# Altium PCB Golden_arduino Updated.PcbDoc
Units mil, origin at the board's own origin, x right, y up, seen from the top; angles counter-clockwise.
Board outline 3500 x 2685 mil, 2 copper layers (Top Layer, Bottom Layer), stack 61.756 mil thick; 58 components, 43 nets, 253 pads, 74 vias.
Unrouted connection lines stored in the file: 22.
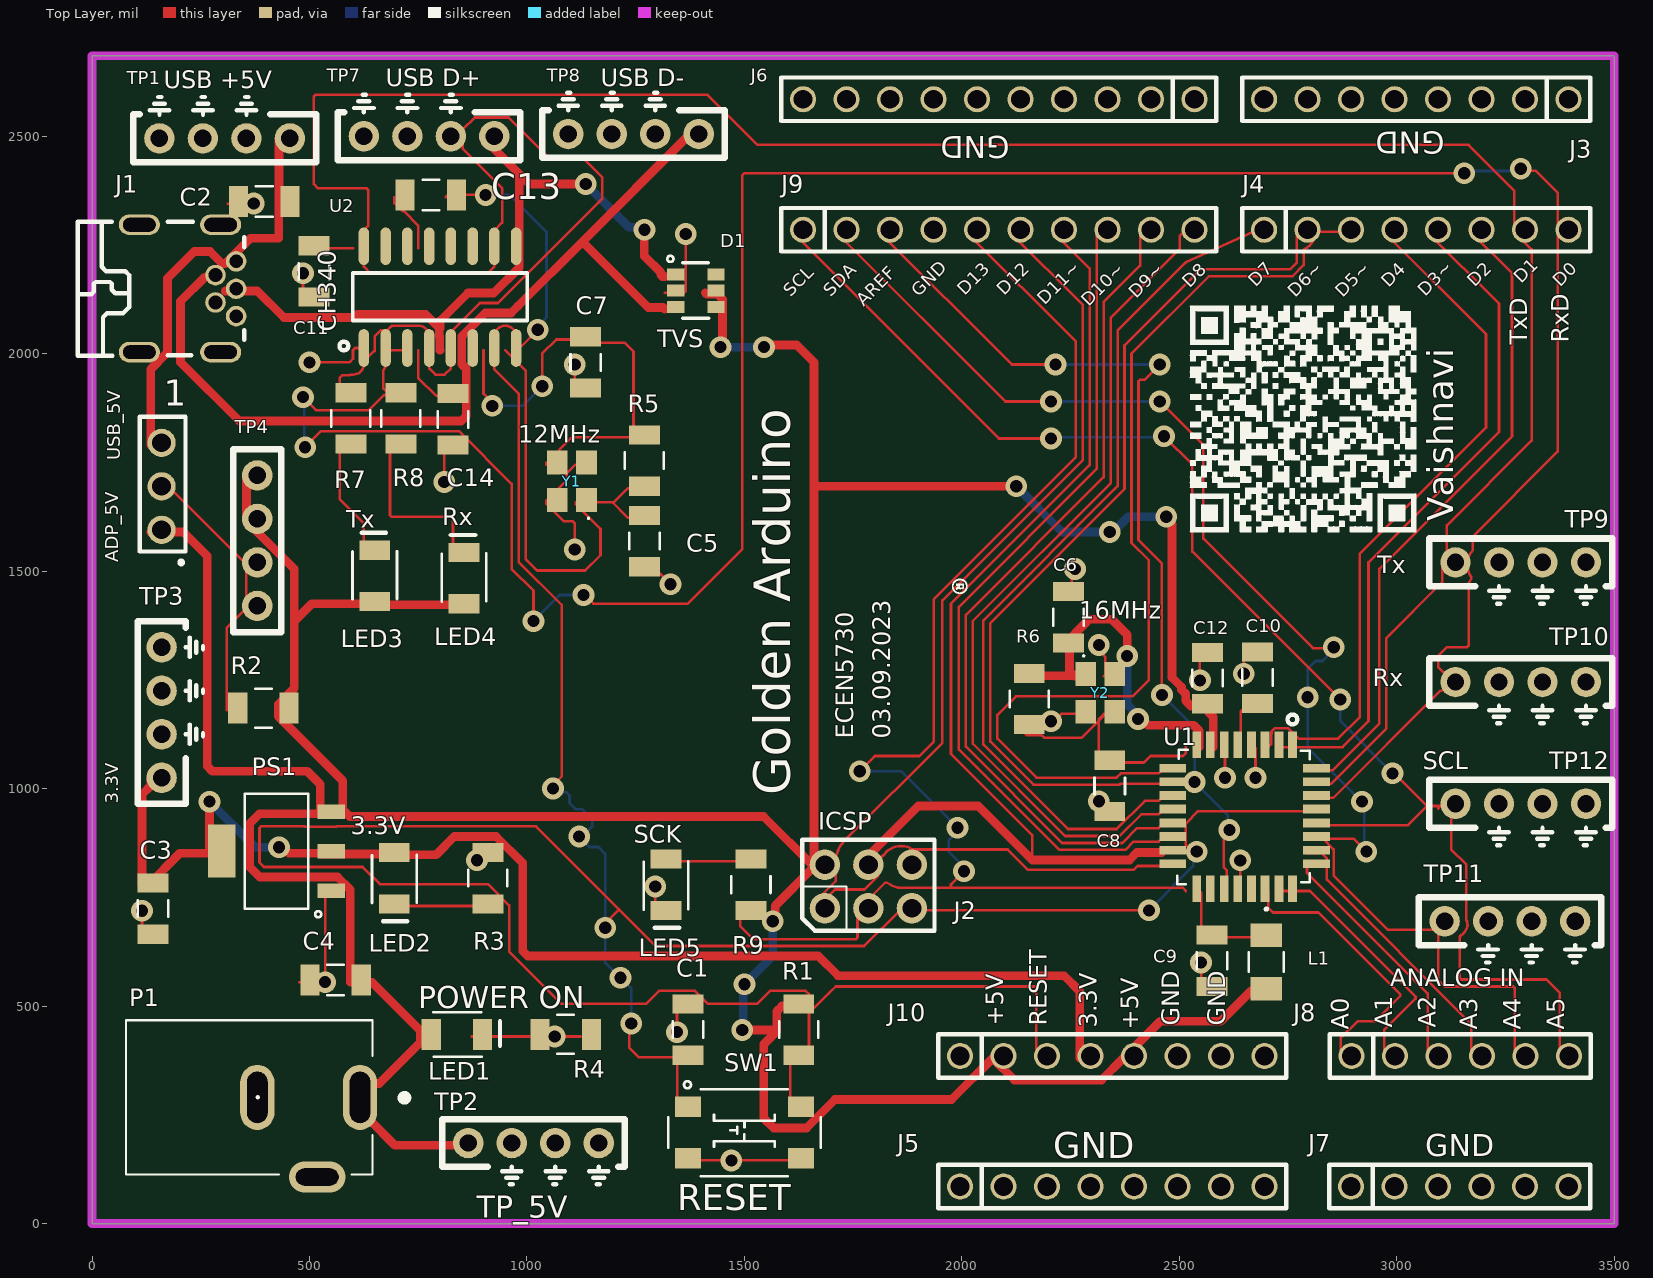
[diagram p0: Top Layer view]
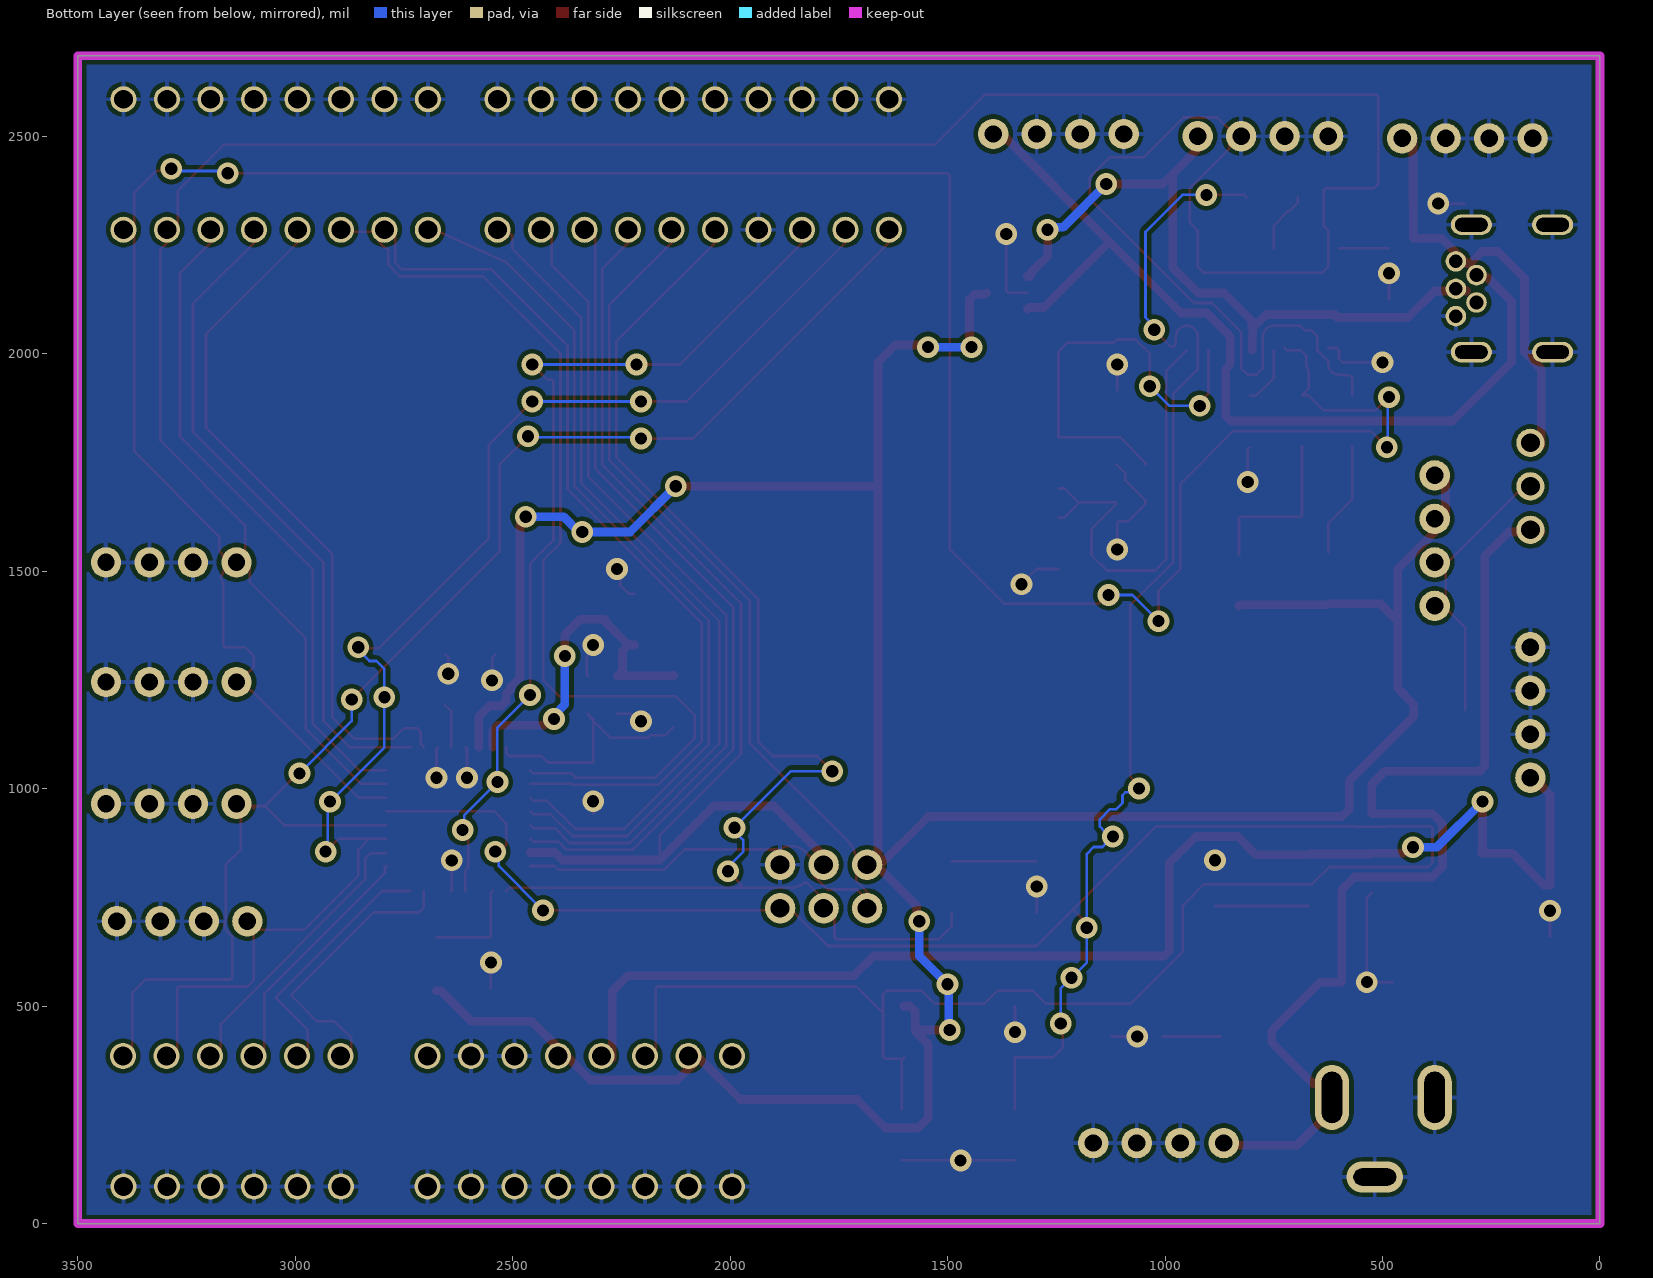
[diagram p1: Bottom Layer view, seen from below]
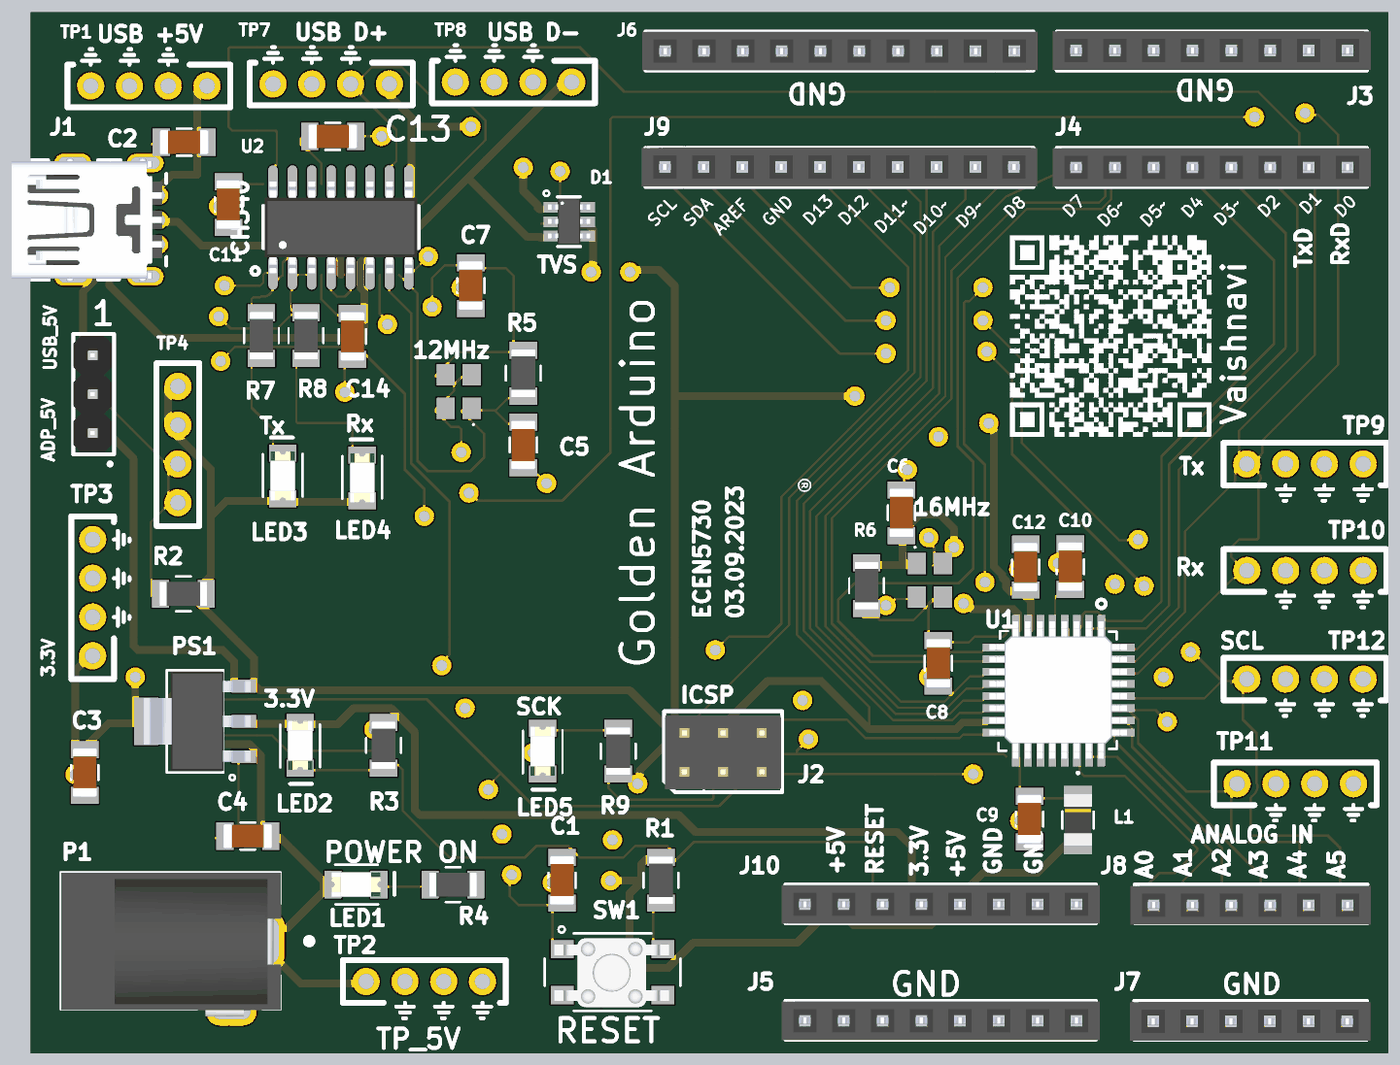
[diagram p2: 3D render of the assembled board from above, using the file's embedded part models]

## Layer stack, top to bottom
Top Solder: solder mask 1, SM-001, Dk 4
Top Layer: signal copper 1.378
Dielectric 1: core 59, Core-043, Dk 4.3
Bottom Layer: signal copper 1.378
Bottom Solder: solder mask 1, SM-001, Dk 4

## Board outline
0,0 3500,0 3500,2685 0,2685

## Design rules (kind name [scope] priority, off if disabled: settings)
Clearance [All] p1: gap=10 ignorepadtopadclearanceinfootprint=FALSE except(0: Arc-Hole Track-Hole SMDPad-Hole THPad-Hole Via-Hole Fill-Hole Poly-Hole Region-Hole Text-Hole)
PlaneClearance [All] p1: clearance=10
PlaneConnect [All] p1: planeconnectstyle=Direct reliefexpansion=20 reliefentries=4 reliefconductorwidth=10 reliefairgap=10
PolygonConnect [All] p1: thpad.connectstyle=Relief thpad.reliefconductorwidth=10 thpad.reliefentries=4 thpad.polygonreliefangle="90 Angle" thpad.airgapwidth=10 smdpad.connectstyle=Direct smdpad.reliefconductorwidth=10 smdpad.reliefentries=4 smdpad.polygonreliefangle="90 Angle" smdpad.airgapwidth=10 via.connectstyle=Direct via.reliefconductorwidth=10 via.reliefentries=4 via.polygonreliefangle="90 Angle" via.airgapwidth=10
RoutingVias [All] p1: holewidth=13 width=25 viastyle="Through Hole" minholewidth=13 minwidth=25 maxholewidth=60 maxwidth=80
SolderMaskExpansion [All] p1: expansion=4 istentingtop=FALSE
Width [All] p1: maxlimit=100 minlimit=6 preferedwidth=6 minimp=50.000000 maximp=50.000000 favimp=50.000000
28 further rules are at their usual default settings.

## Components (designator, comment, footprint, x,y, rotation, side; value= is the part's Value field where it differs from the comment)
1 "PREC003SAAN-RC" 3_PIN_100mil 160,1595 r90 top value="CONN HEADER VERT 3POS 2.54MM"
C1 "1uF" 1206_Passive_Capacitor 1370,446 r90 top
C2 "22uF" 1206_Passive_Capacitor 396,2350 r0 top
C3 "22uF" 1206_Passive_Capacitor 140,724 r90 top
C4 "22uF" 1206_Passive_Capacitor 560,560 r0 top
C5 "22pF" 1206_Passive_Capacitor 1270,1569 r90 top
C6 "22pF" 1206_Passive_Capacitor 2245,1394 r270 top
C7 "22uF" 1206_Passive_Capacitor 1135,1980 r90 top
C8 "22uF" 1206_Passive_Capacitor 2340,1006 r90 top
C9 "22uF" 1206_Passive_Capacitor 2575,604 r90 top
C10 "22uF" 1206_Passive_Capacitor 2680,1255 r270 top
C11 "22uF" 1206_Passive_Capacitor 510,2189 r90 top
C12 "22uF" 1206_Passive_Capacitor 2565,1254 r270 top
C13 "22uF" 1206_Passive_Capacitor 779,2365 r180 top
C14 "22uF" 1206_Passive_Capacitor 830,1849 r270 top
D1 "SRV05-4-P-T7" TVS 1387.76,2145 r0 top value="TVS DIODE 5.5V 6TSOP"
J1 "USB Mini" USB_MINI_B 220,2150 r270 top value="USB mini B"
J2 "NRPN032PAEN-RC" ICSP 1685,725 r90 top
J3 "PPTC081LFBN-RC" "8_PIN_100MIL - Female" 3395,2585 r180 top value=Female
J4 "PPTC081LFBN-RC" 8_PIN_ARD-DIG_100MIL 2695,2285 r0 top value=Female
J5 "PPTC081LFBN-RC" "8_PIN_100MIL - Female" 1996,85 r0 top value=Female
J6 "PPTC101LFBN-RC" "10_PIN_100MIL - Female" 2535,2585 r180 top value=Female
J7 "PPTC061LFBN-RC" "6_PIN_100MIL -Female" 2895,85 r0 top value=Female
J8 "PPTC061LFBN-RC" "6_PIN_100MIL -Female" 2896,385 r0 top value=Female
J9 "PPTC101LFBN-RC" 10_PIN_ARDUINO_100MIL 1635,2285 r0 top value=Female
J10 "PPTC081LFBN-RC" "8_PIN_100MIL - Female" 1996,385 r0 top value=Female
L1 "FB_10uH_1206" AIML-1206_ABR-M 2700,601.5 r270 top
LED1 "Red" LED_1206 839,435 r0 top
LED2 "Red" LED_1206 695,794 r270 top
LED3 "Yellow" LED_1206 650,1489 r90 top
LED4 "Green" LED_1206 855,1484 r90 top
LED5 "Red" LED_1206 1320,779 r270 top
P1 "Power Jack" Power_Jack 616.22,290 r180 top value="CONN PWR JACK 2X5.5MM SOLDER"
PS1 "AMS1117-3.3" LDO 424,856 r90 top value="IC REG LINEAR 3.3V 800MA SOT223"
R1 "10k" 1206_Passive_Resitor 1625,446 r90 top value=10KOhm
R2 "500m" 1206_Passive_Resitor 394,1185 r0 top value=500mOhm
R3 "1k" 1206_Passive_Resitor 910,794 r270 top value="1K Ohm"
R4 "1k" 1206_Passive_Resitor 1089,435 r180 top value="1K Ohm"
R5 "1M" 1206_Passive_Resitor 1270,1754 r90 top value="1M Ohm"
R6 "1M" 1206_Passive_Resitor 2155,1206 r270 top value="1M Ohm"
R7 "1k" 1206_Passive_Resitor 595,1851 r270 top value="1K Ohm"
R8 "1k" 1206_Passive_Resitor 710,1851 r270 top value="1K Ohm"
R9 "1k" 1206_Passive_Resitor 1515,779 r90 top value="1K Ohm"
SW1 "TL3305AF160QG" Switch_JLC 1500.08,209.06 r0 top
TP1 "10x Probe TP" TP10x_Probe 305,2495 r180 top
TP2 "10x Probe TP" TP10x_Probe 1015,185 r0 top
TP3 "10x Probe TP" TP10x_Probe 160,1175 r90 top
TP4 "10x Probe Floating TP" TP10x_Floating 380,1570 r90 top
TP7 "10x Probe TP" TP10x_Probe 775,2500 r180 top
TP8 "10x Probe TP" TP10x_Probe 1245,2505 r180 top
TP9 "10x Probe TP" TP10x_Probe 3285,1520 r0 top
TP10 "10x Probe TP" TP10x_Probe 3285,1245 r0 top
TP11 "10x Probe TP" TP10x_Probe 3260,695 r0 top
TP12 "10x Probe TP" TP10x_Probe 3285,965 r0 top
U1 "ATMEGA328P-ANR" ATMega328P 2650,935 r90 top value="IC MCU 8BIT 32KB FLASH 32TQFP"
U2 "CH340G" "USB to serial" 800,2130 r0 top value="USB to Serial"
Y1 "X322512MSB4SI" "Crystal resonator" 1101.5,1706.68 r90 top value=12MHz
Y2 "X322516MLB4SI" "Crystal resonator" 2320,1220 r270 top value=16MHz

## Footprints (in the part's own frame and the unit in brackets; to place one, negate y for a bottom-side part, rotate by r counter-clockwise, add the part's x,y. Pads: shape width x height; smd on the part's side, far side on the other; paste and mask are expansions set on the pad)
3_PIN_100mil [mm]
  round 1.65 hole 1.1: 1(0,0) 2(2.54,0) 3(5.08,0)
  silkscreen extent -2,-1.4 6.6,1.27, body extent -1.14,-1.27 6.48,1.27, height 8.38
"6_PIN_100MIL -Female" [mil]
  round 60 hole 43.31: 1(0,0) 2(100,0) 3(200,0) 4(300,0) 5(400,0) 6(500,0)
  silkscreen extent -50,-50 550,50, body extent -61,-53 559,47, height 335
"8_PIN_100MIL - Female" [mil]
  round 60 hole 43.31: 1(0,0) 2(100,0) 3(200,0) 4(300,0) 5(400,0) 6(500,0) 7(600,0) 8(700,0)
  silkscreen extent -50,-50 750,50, body extent -60,-51 760,49, height 335
8_PIN_ARD-DIG_100MIL [mil]
  round 60 hole 43.31: 1(0,0) 2(100,0) 3(200,0) 4(300,0) 5(400,0) 6(500,0) 7(600,0) 8(700,0)
  silkscreen extent -50,-50 750,50, body extent -60,-50 760,50, height 335
"10_PIN_100MIL - Female" [mil]
  round 60 hole 43.31: 1(0,0) 2(100,0) 3(200,0) 4(300,0) 5(400,0) 6(500,0) 7(600,0) 8(700,0) 9(800,0) 10(900,0)
  silkscreen extent -50,-50 950,50, body extent -61,-50 959,50, height 335
10_PIN_ARDUINO_100MIL [mil]
  round 60 hole 43.31: 1(0,0) 2(100,0) 3(200,0) 4(300,0) 5(400,0) 6(500,0) 7(600,0) 8(700,0) 9(800,0) 10(900,0)
  silkscreen extent -50,-50 950,50, body extent -60,-49 960,51, height 335
1206_Passive_Capacitor [mil]
  rect 44x71 smd: 1(-59,0) 2(59,0)
  silkscreen extent -19,-35 19,35, body extent -63,-31 63,32, height 50
1206_Passive_Resitor [mil]
  rect 44x71 smd: 1(-59,0) 2(59,0)
  silkscreen extent -19,-45 19,45, body extent -61,-31 61,31, height 26
AIML-1206_ABR-M [mil]
  rect 54x73 smd paste+0 mask+0: 1(-61.5,0) 2(61.5,0)
  silkscreen extent -124,-41 22,41, body extent -66,-36 66,36, height 55
ATMega328P [mm]
  rect 1.55x0.508 smd mask+0.025: 1(4.2,-2.794) 2(4.2,-2.007) 3(4.2,-1.194) 4(4.2,-0.406) 5(4.2,0.406) 6(4.2,1.194) 7(4.2,2.007) 8(4.2,2.794) 17(-4.2,2.794) 18(-4.2,2.007) 19(-4.2,1.194) 20(-4.2,0.406) 21(-4.2,-0.406) 22(-4.2,-1.194) 23(-4.2,-2.007) 24(-4.2,-2.794)
  rect 0.508x1.55 smd mask+0.025: 9(2.843,4.2) 10(2.056,4.2) 11(1.243,4.2) 12(0.455,4.2) 13(-0.357,4.2) 14(-1.145,4.2) 15(-1.958,4.2) 16(-2.745,4.2) 25(-2.745,-4.2) 26(-1.958,-4.2) 27(-1.145,-4.2) 28(-0.357,-4.2) 29(0.455,-4.2) 30(1.243,-4.2) 31(2.056,-4.2) 32(2.843,-4.2)
  silkscreen extent -3.94,-3.81 5.97,3.94, body extent -4.45,-4.47 4.55,4.53, height 1.16
"Crystal resonator" [mil]
  rect 55.11x47.24 smd: 1(-43.3,-35.43) 2(43.31,-35.43) 3(43.32,31.5) 4(-43.3,31.5)
  silkscreen extent -87,-42 -83,-38, body extent -65,-47 65,47, height 31
ICSP [mil]
  round 70 hole 43.31: 1(0,0) 2(0,-100) 3(0,-200) 4(100,0) 5(100,-100) 6(100,-200)
  silkscreen extent -52,-252 157,52, body extent -44,-250 146,50, height 330
LDO [mil]
  rect 33x63 smd: 1(-91,-126) 2(0,-126) 3(91,-126)
  rect 122x63 smd: 4(0,126)
  silkscreen extent -152,-103 132,73, body extent -128,-144 128,132, height 73
LED_1206 [mil]
  rect 44x71 smd: 1(-59,0) 2(59,0)
  silkscreen extent -54,-51 99,51, body extent -63,-31 63,31, height 28
Power_Jack [mm]
  oval 2x3.8 hole 1.2 slot 3 at 90 deg: 1(0,0) 2(6,0)
  oval 3.3x1.8 hole 1 slot 2.5 at 0 deg: 3(2.5,4.65)
  silkscreen extent -2.79,-4.5 13.68,4.5, body extent -0.76,-4.45 13.64,4.95, height 11.49
Switch_JLC [mm]
  rect 1.5x1.2 smd: 1(-3.3,1.5) 2(3.3,1.5) 3(-3.3,-1.5) 4(3.3,-1.5)
  silkscreen extent -4.44,-2.54 4.45,3, body extent -3.8,-2.29 3.7,2.21, height 3.7
TP10x_Floating [mil] "Small Probs footprint"
  round 70 hole 40: 1(-150,0) 2(-50,0) 3(50,0) 4(150,0)
  silkscreen extent -210,-55 210,55
TP10x_Probe [mil] "Small Probs footprint"
  round 70 hole 40: 1(-150,0) 2(-50,0) 2(50,0) 2(150,0)
  silkscreen extent -210,-95 210,55
TVS [mm]
  rect 1x0.7 smd mask+0.025: 1(-1.162,0.95) 2(-1.162,0) 3(-1.162,-0.95) 4(1.2,-0.95) 5(1.2,0) 6(1.2,0.95)
  silkscreen extent -1.65,-1.63 0.76,2.03, body extent -1.37,-1.44 1.38,1.46, height 1.1
"USB to serial" [mil]
  oval 24x86.61 smd: 1(-175,-117) 2(-125,-117) 3(-75,-117) 4(-25,-117) 5(25,-117) 6(75,-117) 7(125,-117) 8(175,-117) 9(175,117) 10(125,117) 11(75,117) 12(25,117) 13(-25,117) 14(-75,117) 15(-125,117) 16(-175,117)
  silkscreen extent -231,-122 201,56, body extent -197,-118 197,118, height 71
USB_MINI_B [mm]
  round 1.2 hole 0.8: 1(-1.58,2.826) 2(-0.78,1.622) 3(0.02,2.826) 4(0.82,1.622) 5(1.62,2.826)
  oval 1.2x2.4 hole 0.8 slot 1.9 at 90 deg: 6(-3.72,1.924) 7(3.72,1.924) 8(-3.72,-2.826) 9(3.72,-2.826)
  silkscreen extent -3.89,-6.42 3.93,3.3, body extent -4.04,-6.83 4.06,3.02, height 3.98

## Part data
1: library part SW_3Pin_100mil_Switch, "Connector Header Through Hole 3 position 0.100\" (2.54mm)", LCSC Part#=C49257, Digikey Link=https://www.digikey.com/product-detail/en/PREC003SAAN-RC/S1012EC-03-ND/2774851/?itemSeq=304982371, MFR Part #=PREC003SAAN-RC, Type=Extended
C1: library part C_1uF_1206, "MULTILAYER CERAMIC CAPACITORS MLCC - SMD/SMT 1UF 50V 1206 ROHS", LCSC Part#=C1848, MFR Part #=CL31B105KBHNNNE, Digikey Link=https://www.digikey.com/product-detail/en/C1206C105M4RACTU/399-8150-1-ND/3471873/?itemSeq=304982366, Type=Basic
C2 C3 C4 C7 C8 C9 C10 C11 C12 C13 C14: library part C_22uF_1206, "22uF ±10% 25V X5R 1206 Multilayer Ceramic Capacitors MLCC - SMD/SMT RoHS", LCSC Part#=C12891, MFR Part #=CL31A226KAHNNNE, Datasheet=https://datasheet.lcsc.com/lcsc/1811031514_Samsung-Electro-Mechanics-CL31A226KAHNNNE_C12891.pdf, Type=basic
C5 C6: library part C_22pF_1206, "22pF ±5% 1kV C0G 1206 Multilayer Ceramic Capacitors MLCC - SMD/SMT RoHS", LCSC Part#=C313096, MFR Part #=1206CG220J102NT, Datasheet=https://datasheet.lcsc.com/lcsc/1810311150_FH-Guangdong-Fenghua-Advanced-Tech-1206CG220J102NT_C313096.pdf, Type=Extended
D1: library part D_TVS_Diode, "TVS SOT-23-6 ROHS", LCSC Part#=C85364, Datasheet=https://datasheet.lcsc.com/szlcsc/ProTek-Devices-SRV05-4-P-T7_C85364.pdf, MFR Part #=SRV05-4-P-T7, Type=Basic
J1: library part J_USB_B_Mini, "Through Hole USB Connectors RoHS", LCSC Part#=C46398, MFR Part #=920-462A2021D10102, Datasheet=https://datasheet.lcsc.com/szlcsc/2103081233_Jing-Extension-of-the-Electronic-Co-920-462A2021D10102_C46398.pdf, Type=Extended
J2: library part J_ICSP, "Connector Header Through Hole 6 position 0.079\" (2.00mm)", LCSC Part#=C124384, Digikey Link=https://www.digikey.com/product-detail/en/NRPN032PAEN-RC/S5801-03-ND/804955/?itemSeq=304982355, MFR Part #=NRPN032PAEN-RC, Type=Extended
J3 J5 J10: library part JF_8_PIN_FEMALE, "8 Position Header Connector 0.100\" (2.54mm) Through Hole Tin", LCSC Part#=C27438, Digikey Link=https://www.digikey.com/product-detail/en/PPTC081LFBN-RC/S7006-ND/810147/?itemSeq=304982354, MFR Part #=PPTC081LFBN-RC, Type=Extended
J4: library part JF_8_PIN_FEMALE_ARD-Dig, "8 Position Header Connector 0.100\" (2.54mm) Through Hole Tin", LCSC Part#=C27438, Digikey Link=https://www.digikey.com/product-detail/en/PPTC081LFBN-RC/S7006-ND/810147/?itemSeq=304982354, MFR Part #=PPTC081LFBN-RC, Type=Extended
J6: library part JF_10_PIN_FEMALE_, "10 Position Header Connector 0.100\" (2.54mm) Through Hole Tin", LCSC Part#=C225507, Digikey Link=https://www.digikey.com/product-detail/en/PPTC101LFBN-RC/S7008-ND/810149/?itemSeq=304982352, MFR Part #=PPTC101LFBN-RC, Type=Extended
J7 J8: library part JF_6_PIN_FEMALE, "6 Position Header Connector 0.100\" (2.54mm) Through Hole Tin", LCSC Part#=C40877, Digikey Link=https://www.digikey.com/product-detail/en/PPTC061LFBN-RC/S7004-ND/810145/?itemSeq=304982353, MFR Part #=PPTC061LFBN-RC, Type=Extended
J9: library part JF_10_PIN_FEMALE_ARDUINO, "10 Position Header Connector 0.100\" (2.54mm) Through Hole Tin", LCSC Part#=C225507, Digikey Link=https://www.digikey.com/product-detail/en/PPTC101LFBN-RC/S7008-ND/810149/?itemSeq=304982352, MFR Part #=PPTC101LFBN-RC, Type=Extended
L1: "25mA 10uH ±10% 800mΩ 1206  Inductors (SMD) ROHS", LCSC Part#=C1051, MFR Part #=CMI321609X100KT, Mfr_Name="FH (Guangdong Fenghua Advanced Tech)", Datasheet=https://datasheet.lcsc.com/lcsc/1810311314_FH--Guangdong-Fenghua-Advanced-Tech-CMI321609X100KT_C1051.pdf, Type=Basic
LED1 LED2 LED5: library part LED_RED_1206, "Red 621~631nm 1206 Light Emitting Diodes (LED) RoHS", LCSC Part#=C93133, MFR Part #=15-21/R6C-FQ1R1B/2T, Datasheet=https://datasheet.lcsc.com/szlcsc/1811151241_Everlight-Elec-15-21-R6C-FQ1R1B-2T_C93133.pdf, Type=Extended
LED3: library part LED_YELLOW_1206, "yellow 1206  Light Emitting Diodes (LED) ROHS", LCSC Part#=C93094, MFR Part #=NCD1206Y1, Datasheet=https://datasheet.lcsc.com/lcsc/2008201033_Foshan-NationStar-Optoelectronics-NCD1206Y1_C93094.pdf, Type=Extended
LED4: library part LED_GREEN_1206, "Green 513~528nm 1206 Light Emitting Diodes (LED) RoHS", LCSC Part#=C434439, MFR Part #=SZYY1206G, Datasheet=https://datasheet.lcsc.com/lcsc/2006301532_Yongyu-Photoelectric-SZYY1206G_C434439.pdf, Type=Extended
P1: library part "P_Power Jack", "Power Barrel Connector Jack 2.10mm ID (0.083\"), 5.50mm OD (0.217\") Through Hole, Right Angle", LCSC Part#=C136744, MFR Part #=PJ-102A, Digikey Link=https://www.digikey.com/product-detail/en/PJ-102A/CP-102A-ND/275425/?itemSeq=304982367, Type=Extended
PS1: library part PS_AMS_LDO_3v3, "LOW DROPOUT REGULATORS(LDO) POSITIVE FIXED 1.3V @ 800MA 15V 3.3V 1A SOT-223 ROHS", LCSC Part#=C6186, MFR Part #=AMS1117-3.3, Type=Basic
R1: library part R_10KOhm_1206, "10 kOhms ±5% 0.25W, 1/4W Chip Resistor 1206 (3216 Metric) Automotive AEC-Q200 Thick Film", LCSC Part#=C17902, MFR Part #=RMCF1206FT10K0, Digikey Link=https://www.digikey.com/en/products/detail/stackpole-electronics-inc/RMCF1206FT10K0/1759669, Type=Basic
R2: library part R_500mOhm_1206, "Resistors/Shunt 250mW 500mΩ ±800ppm/℃ ±5% 1206  Current Sense  Resistors ROHS", LCSC Part#=C247433, MFR Part #=1206W4J050KT5E, Datasheet=https://datasheet.lcsc.com/lcsc/1810301438_UNI-ROYAL-Uniroyal-Elec-1206W4J050KT5E_C247433.pdf, Type=Extended
R3 R4 R7 R8 R9: library part R_1K_1206, "CHIP RESISTOR - SURFACE MOUNT 1KOHMS ±1% 1/4W 1206 ROHS", LCSC Part#=C4410, MFR Part #=RNCP1206FTD1K00CT, Digikey Link=https://www.digikey.com/product-detail/en/RNCP1206FTD1K00/RNCP1206FTD1K00CT-ND/2240675/?itemSeq=304982373, Type=Basic
R5 R6: library part R_1M_1206, "CHIP RESISTOR - SURFACE MOUNT 1MOHMS ±1% 1/4W 1206 ROHS", LCSC Part#=C17927, MFR Part #=RMCF1206JT1M00, Digikey Link=https://www.digikey.com/product-detail/en/RMCF1206JT1M00/RMCF1206JT1M00CT-ND/1942830/?itemSeq=304982358, Type=Basic
SW1: library part SW_Push_Button_JLC, "Tactile Switch SPST-NO Top Actuated Surface Mount", LCSC Part#=C2837550, MFR Part #=KH-4.5X4.5X4.3H-STM, Datasheet=https://datasheet.lcsc.com/lcsc/2106081532_Shenzhen-Kinghelm-Elec-KH-4.5X4.5X4.3H-STM_C2837550.pdf, Type=Extended
TP1 TP2 TP3 TP7 TP8 TP9 TP10 TP11 TP12: library part TP_10x_Probe, "Test Point 300 mil centers"
TP4: library part TP_10x_Floating, "Test Point 300 mil centers"
U1: library part U_ATMega328P, "AVR AVR® ATmega Microcontroller IC 8-Bit 20MHz 32KB (16K x 16) FLASH 32-TQFP (7x7)", LCSC Part#=C14877, MFR Part #=ATMEGA328P-AU, Digikey Link=https://www.digikey.com/product-detail/en/ATMEGA328P-ANR/ATMEGA328P-ANRCT-ND/2774230/?itemSeq=304982365, Type=Basic
U2: library part U_USBtoSerial, "Transceiver USB 2.0 2Mbps SOP-16_150mil USB ICs RoHS", LCSC Part#=C14267, Datasheet=https://datasheet.lcsc.com/lcsc/2008191806_WCH-Jiangsu-Qin-Heng-CH340G_C14267.pdf, MFR Part #=CH340G, Type=Basic
Y1: library part X_12MHz_Res, "SMD Crystal Resonators 12MHz ±10ppm SMD-3225_4P RoHS", LCSC Part#=C9002, Datasheet=https://datasheet.lcsc.com/szlcsc/Yangxing-Tech-X322512MSB4SI_C9002.pdf, MFR Part #=X322512MSB4SI, Type=Basic
Y2: library part X_16Mhz_Res, "±10ppm 16000000Hz -40℃~85℃ 贴片无源晶振 60Ω 9pF SMD3225-4P Crystals ROHS", LCSC Part#=C13738, MFR Part #=X322516MLB4SI, Type=Basic

## Via types
v1: diameter 50, hole 28, Top Layer to Bottom Layer, 74 vias

## Nets (pads, with @x,y where several pads share a name; then routed paths per layer and width w, separated by ;. In a path a pad name is that pad's centre, name@x,y a point inside that pad or via, vN(x,y) a via of type N, cw(c..) or ccw(c..) an arc to the next point about the centre after c; other vN are vias at no path point)
3.3V: C3.2 J10.4 LED2.1 PS1.2 PS1.4 TP3.1 | length 3047.5
  Top Layer w20: TP3.1@135,1020 135,1006.47 115,986.47 115,778 128.5,778 201.5,851 273,851 270,854 v1(270,970) ; v1(430,865) 438.12,865 452.12,851 525,851 526.5,849.5 668.5,849.5 670,848 791.14,848 833.14,890 928.78,890 990,828.78 990,626.72 1001.72,615 1670,615 1715,570 2235,570 2271,534 J10.4@2271,380
  Bottom Layer w20: v1(270,970) 375,865 v1(430,865)
12MHz_Osc-1: C5.2 R5.1 U2.8 Y1.1 | length 1052.1
  Top Layer w6: 950,2008 997,1961 997,1528.12 1023.62,1501.5 1134,1501.5 1169,1536.5 1169,1597.37 1111.93,1654.44 1111.93,1658.38 1196.12,1658.38 ; C5.2@1245,1623 1231.5,1623 1196.12,1658.38 ; R5.1@1245,1690 1231.5,1690 1199.88,1658.38 1196.12,1658.38
12MHz_Osc-2: C7.2 R5.2 U2.7 Y1.3 | length 1005.2
  Top Layer w6: 900,2008 900,1908.08 920,1888.08 v1(920,1880) ; v1(1035,1925) 1035,2000 1067.51,2032.51 1111.49,2032.51 1119,2025 1225,2025 1245,2005 1245,1808 1104.07,1808 1045,1748.93 1045,1745
  Bottom Layer w6: v1(920,1880) 990,1880 v1(1035,1925)
"16MHz Osc-1": C6.2 R6.1 U1.7 Y2.1 | length 807.6
  Top Layer w20: R6.1@2130,1260 2130.85,1259.15 2258.72,1259.15 ; C6.2@2220,1330 C6.2@2233.5,1330 ; 2259.57,1258.3 2258.72,1259.15 ; v1(2380,1305) 2380,1353.64 2344.57,1389.07 2287.43,1389.07 2287.43,1383.93 C6.2@2233.5,1330 ; v1(2405,1160) 2413.12,1160 2427.25,1145.87 2533.28,1145.87 2546,1133.15 2546,1095.35 ; C6.2@2233.5,1330 2247.64,1315.86 2247.64,1270.23 2258.72,1259.15
  Bottom Layer w20: v1(2380,1305) 2380,1193.12 2405,1168.12 v1(2405,1160)
"16MHz Osc-2": C8.2 R6.2 U1.8 Y2.3 | length 570.8
  Top Layer w6: R6.2@2130,1142 2149,1123 2183.26,1123 2189.26,1117 2275.75,1117 2326.5,1167.75 2326.5,1171.68 2315,1160.18 2315,1060 2418.82,1060 2433.66,1074.84 2508,1074.84 2515,1081.84 2515,1095.35
328_MISO: J2.1 J9.6 U1.16 | length 2787.5
  Top Layer w6: J9.6@2110,2280 2278,2112 2278,1755.37 1955,1432.37 1955,1105 1730.68,880.68 ccw(c1782.8,828.53) 1710.08,840.68 ccw(c1716,839.72) 1710,839.76 1710,786.97 1660,736.97 1660,720 1708,768 1775.88,768 1808,800.12 1808,835.88 1815.39,843.27 1817.12,845 ccw(c1815.66,850.82) 1820.57,847.37 cw(c1860,820) 1860,868 cw(c1860,820) 1886.53,860 2105.27,860 2152.27,813 2394.82,813 2403.75,821.93 U1.16@2459.65,821.93
328_MOSI: J2.5 J9.7 U1.15 | length 2512.3
  Top Layer w6: J2.5@1760,820 1760,820.41 J2.5@1765.49,825.89 ; 2161.8,836 2161.8,893.2 1975,1080 1975,1425 2294,1744 2294,2196 J9.7@2210,2280
  Top Layer w20: J2.5@1760,820.41 1899.59,960 2037.8,960 2161.8,836 2385.29,836 2402.22,852.93 U1.15@2459.65,852.93
328_SCK: J2.2 J9.5 R9.1 U1.17 | length 3227.2
  Top Layer w6: R9.1@1490,715 1490,684 1520,654 1756.49,654 1760,657.51 1760,720 1823.81,783.81 1828.47,783.81 ccw(c1860,820) 1860,772 1975,772 ; v1(1765,1040) 1800,1075 1902.37,1075 1935,1107.63 1935,1435 2262,1762 2262,2028 J9.5@2010,2280 ; v1(2005,810) 1975,780 1975,772 ; 2515,764.65 2515,765 2508,772 1975,772
  Bottom Layer w6: v1(1765,1040) 1860,1040 v1(1990,910) 1990,901.92 1970,881.92 1970,854.41 2005,819.41 v1(2005,810)
+5V: C12.2 D1.5 J2.4 J10.2 J10.5 L1.2 LED3.1 LED4.1 R1.2 R2.2 TP4.3 TP4.4 U1.6 | length 7525.9
  Top Layer w20: TP4.4@355,1715 355,1615 465,1505 465,1385 ; LED4.1@830,1420 827.5,1422.5 627.5,1422.5 625,1425 505,1425 465,1385 ; 1410,2140 1413.62,2136.38 1437.97,2136.38 1449.69,2124.66 1449.69,2019.69 v1(1445,2015) ; v1(1495,445) 1571.78,445 1574.5,442.28 ; v1(1545,2015) 1550,2020 1620,2020 1660,1980 1660,1695 ; v1(1565,695) 1570.74,700.74 1570.74,730.74 J2.4@1660,820 ; R1.2@1600,500 1586.5,500 1574.5,488 1574.5,442.28 ; v1(2125,1695) 1660,1695 ; v1@2477.53,1612.47 2483,1607 2483,1255.64 2505,1233.64 2505,1227.58 2514.5,1218.08 2514.5,1202 2526.5,1190 2540,1190 2553.5,1190 2578,1165.5 2578,1095.35 ; L1.2@2675,535 2665.5,535 2595.5,465 2456,465 2371,380 2321,330 2121,330 2071,380 1976,285 1708.32,285 1642.81,219.49 1567.19,219.49 1544.5,242.18 1544.5,412.28 1574.5,442.28 ; 465,1385 465,1230.5 428,1193.5 428,1180 428,1166.5 576.5,1018 576.5,951.72 592.22,936 1544,936 J2.4@1660,820 ; J2.4@1660,820 1660,1695
  Bottom Layer w20: v1(1445,2015) v1(1545,2015) ; v1(1495,445) 1497.5,447.5 1497.5,547.5 v1(1500,550) 1565,615 v1(1565,695) ; v1(2125,1695) 2230,1590 v1(2340,1590) 2347.78,1590 2382.78,1625 v1(2470,1625)
AD0: J8.1 U1.23 | length 651.4
  Top Layer w6: 2704,764.65 2704,726.73 2715.73,715 2820,715 3007.51,527.49 3007.51,522.51 2950,465 2910,465 2871,426 J8.1@2871,380
AD1: J8.2 U1.24 | length 580.4
  Top Layer w6: 2735,764.65 2800.35,764.65 3043.13,521.87 3043.13,516.9 2971,444.77 J8.2@2971,380
AD2: J8.3 U1.25 | length 558.2
  Top Layer w6: U1.25@2790.35,821.93 2793.56,818.73 2793.56,806.44 3071,529 J8.3@3071,380
AD3: J8.4 U1.26 | length 650.9
  Top Layer w6: U1.26@2790.35,852.93 2791.65,851.64 2826.35,851.64 2839,838.99 2839,791 3171,459 J8.4@3171,380
AD4/SDA: J8.5 J9.2 TP11.1 U1.27 | length 3227.6
  Top Layer w6: J9.2@1710,2280 2100,1890 v1(2205,1890) ; v1(2455,1890) 2555,1790 2555,1575 2806.96,1323.04 2853.04,1323.04 v1(2855,1325) ; U1.27@2790.35,884.93 U1.27@2830.07,884.93 ; v1(2930,855) 2900.07,884.93 U1.27@2830.07,884.93 ; J8.5@3271,380 3271,541.49 3267.49,545 3110,545 3095,560 3095,675 2980,675 2855,800 2855,860 U1.27@2830.07,884.93
  Bottom Layer w6: v1(2205,1890) v1(2455,1890) ; v1(2855,1325) 2855,1318.91 2829.38,1293.29 2813.29,1293.29 2795,1275 v1(2795,1210) 2795,1095 2925,965 2925,860 v1(2930,855)
  other v1: 2920,970
AD5/SCL: J8.6 J9.1 TP12.1 U1.28 | length 3337.4
  Top Layer w6: J9.1@1610,2280 2085,1805 v1(2205,1805) ; v1(2465,1810) 2530,1745 2530,1545 v1(2870,1205) ; U1.28@2790.35,915.93 3025.93,915.93 3070,960 ; v1(2990,1035) 2995,1035 3070,960 ; J8.6@3371,380 3375,384 3375,530 3344,561 3148.51,561 3145,564.51 3145,657.42 3145,658.78 3145.58,660 cw(c3151,657.42) 3147.64,662.39 ccw(c3127.83,692.08) 3162.68,684.39 ccw(c3156.82,685.65) 3162.73,686.66 cw(c3210,695) 3162.08,692.2 ccw(c3156.09,691.82) 3160.96,695.33 ccw(c3151.32,688.35) 3160,696.49 3160,825 3125,860 3125,960 TP12.1@3100.92,960 ; 3070,960 3095,960 ; 3095,960 3095,954.08 TP12.1@3100.92,960 ; 3095,960 TP12.1@3100.92,960
  Bottom Layer w6: v1(2205,1805) 2207.5,1807.5 2462.5,1807.5 v1(2465,1810) ; v1(2870,1205) 2870,1155 v1(2990,1035)
ADP_+5V: 1.1 C4.2 LED1.1 P1.1 PS1.3 TP2.1 | length 2480.7
  Top Layer w20: 1.1@135,1590 210,1590 265,1535 265,1051.72 276.72,1040 495,1040 525,1010 525,942 384.99,942 362,919.01 362,820.47 385.72,796.75 564.53,796.75 594,767.28 594,555 643.5,555 755,443.5 755,430 755,416.5 660.59,322.09 618.35,322.09 591.22,294.96 591.22,285 591.22,265.46 618.35,238.33 637.89,238.33 696.22,180 TP2.1@840,180
AREF: J9.3 U1.20 | length 2103
  Top Layer w6: J9.3@1810,2280 2115,1975 v1(2215,1975) ; v1(2455,1975) 2420,1940 2409.51,1940 2406,1936.49 2406,1571.63 2460,1517.63 v1(2460,1215) ; 2609,764.65 2609,812.26 2602,819.26 2602,880.09 2615,893.09 v1(2615,905)
  Bottom Layer w6: v1(2215,1975) v1(2455,1975) ; v1(2460,1215) 2535,1140 v1(2535,1015) 2611,939 2611,909 v1(2615,905)
CH340_RxD: J4.7 R8.1 TP10.1 U1.31 U2.3 | length 6450.8
  Top Layer w6: v1(485,1900) 515,1870 636.5,1870 671.5,1905 685,1905 670,1920 670,1961.69 ccw(c650,1976.69) 675,1976.69 675,1995 688,2008 720,2008 U2.3 ; v1(490,1785) 527,1822 843.88,1822 965,1700.88 965,1505 1015,1455 v1(1015,1385) ; v1(1130,1445) 1130,1440 1138.11,1440 1153.11,1425 1370,1425 1495,1550 1495,2410 1500,2415 v1(3155,2415) ; 2790.35,978.93 2853.93,978.93 3099.89,1224.89 3102.57,1224.89 3117.68,1240 3135,1240 3095,1280 3095,1305 3115,1325 3161.49,1325 3165,1328.51 3165,1471.88 ccw(c3100,1515) 3165.93,1473.32 ccw(c3100,1515) 3170.75,1482.16 ccw(c3165.31,1484.69) 3170.29,1488.03 cw(c3210,1515) 3175,1547.85 3175,1580 3370,1775 3370,2370 3319,2421 3289,2421 v1(3285,2425)
  Bottom Layer w6: v1(485,1900) 487.5,1897.5 487.5,1787.5 v1(490,1785) ; v1(1015,1385) 1075,1445 v1(1130,1445) ; v1(3155,2415) 3160,2420 3280,2420 v1(3285,2425)
CH340_TxD: J4.8 R7.1 TP9.1 U1.30 U2.2 | length 7121.3
  Top Layer w6: R7.1@570,1905 570,1945 575,1950 592,1950 593.9,1951.9 596.39,1951.9 596.76,1951.9 ccw(c600,1976.69) 625,1976.69 625,1983 647.52,2005.52 650,2005.52 650,2008 650,2039.07 664.97,2054.04 679.37,2054.04 687.89,2062.55 689.64,2064.31 750,2064.31 cw(c750,2039.31) 775,2039.31 775,1976.69 775,1966.34 776.76,1964.58 789.64,1951.69 810.36,1951.69 825,1966.34 825,2049.66 891.71,2116.37 933.46,2116.37 1173,2355.91 1173,2405.74 1126.74,2452 1048.93,2452 957.93,2543 880.12,2543 852,2514.88 852,2471.74 943,2380.74 943,2301.66 925,2283.66 925,2200.34 910.36,2185.69 639.64,2185.69 625,2200.34 625,2283.66 635,2293.66 635,2376.49 631.49,2380 520,2380 510,2390 510,2591.49 513.51,2595 1415,2595 1530,2480 3165,2480 3270,2375 3270,2280 3310,2240 3310,1800 3115,1605 3115,1545 TP9.1@3127.5,1532.5 ; 2790.35,1010.93 2849.07,1010.93 2975.91,1137.77 2975.91,1345.91 3104.51,1474.51 3104.51,1509.51 TP9.1@3110,1515
GND: C1.2 C2.1 C3.1 C4.1 C5.1 C6.1 C7.1 C8.1 C9.1 C10.1 C11.1 C12.1 C14.2 D1.2 J1.5 J1.6 J1.7 J1.8 J1.9 J2.6 J3.1 J3.2 J3.3 J3.4 J3.5 J3.6 J3.7 J3.8 J5.1 J5.2 J5.3 J5.4 J5.5 J5.6 J5.7 J5.8 J6.1 J6.2 J6.3 J6.4 J6.5 J6.6 J6.7 J6.8 J6.9 J6.10 J7.1 J7.2 J7.3 J7.4 J7.5 J7.6 J9.4 J10.6 J10.7 LED5.2 P1.2 P1.3 PS1.1 R3.1 R4.1 SW1.3 SW1.4 TP1.2 TP2.2 TP3.2 TP7.2 TP8.2 TP9.2 TP10.2 TP11.2 TP12.2 U1.3 U1.5 U1.21 U2.1 Y1.2 Y1.4 Y2.2 Y2.4 | length 2369.2
  Top Layer w6: C3.1@115,660 v1(115,719) ; 312,2345 v1(372,2345) ; 476,555 v1(536,555) 536,749 PS1.1@525,760 ; C11.1@485,2125 v1(485,2185) ; v1(500,1980) 591.69,1980 600,1988.31 600,2008 605,2013 U2.1 ; C14.2@805,1785 810,1780 v1(810,1705) ; v1(885,835.34) R3.1@885,848 ; v1(1064,430) 1123,430 ; v1(1110,1550) 1110,1610 1105,1615 1084.44,1615 1045,1654.44 1045,1662.31 1091.31,1708.62 1091.31,1724.37 1111.93,1744.99 ; C7.1@1110,1916 v1(1110,1975) ; C5.1@1245,1505 1295,1505 v1(1330,1470) ; LED5.2@1295,715 v1(1295,775) ; 1316.99,2140 1361.49,2140 1365,2143.51 v1(1365,2275) ; v1(1345,440) C1.2@1345,500 ; SW1.3@1345.16,145 v1(1470,145) SW1.4@1605,145 ; v1(2205,1155) 2212.15,1155 2228.84,1171.69 2259.57,1171.69 ; C6.1@2220,1448 2233.5,1448 2252.5,1467 2252.5,1497.5 v1(2260,1505) ; C8.1@2315,942 v1(2315,971) ; v1(2315,1330) 2315,1318.09 2330,1303.09 2330,1261.8 2326.5,1258.3 ; C12.1@2540,1308 2547.34,1300.66 v1(2547.34,1248.88) ; C9.1@2550,540 v1(2550,600) ; v1(2605,1025) 2605,1091.35 2609,1095.35 ; v1(2640,835) 2640,765.65 2641,764.65 ; v1(2648.08,1264) 2648.08,1302.08 C10.1@2655,1309 ; 2672,1095.35 2675,1092.35 v1(2675,1025)
Net1_2: 1.2 R2.1 TP4.1 TP4.2 | length 646.1
  Top Layer w6: 1.2@135,1690 180,1690 355,1515 355,1415 310,1370 310,1180
NetC9_2: C9.2 L1.1 U1.18 | length 233.3
  Top Layer w6: 2546,764.65 2550,760.65 2550,658 L1.1@2675,658
NetC10_2: C10.2 U1.4 | length 101.4
  Top Layer w6: 2641,1095.35 2641,1177 C10.2@2655,1191
NetC13_2: C13.2 U2.13 | length 142.4
  Top Layer w6: 695,2360 695,2346.5 714,2327.5 716.81,2327.5 750,2294.31 750,2242
NetC14_1: C14.1 U2.4 | length 135.7
  Top Layer w6: 750,2008 750,1944.5 791.5,1903 C14.1@805,1903
NetJ4_1: J4.1 U1.11 | length 1992
  Top Layer w6: U1.11@2459.65,978.93 2452.65,971.93 2420.81,971.93 2355.88,907 2243.86,907 2049.5,1101.36 2049.5,1386.87 2352.63,1690 2358,1695.37 2358,2053 2513.24,2208.24 2515,2210 J4.1@2670,2280
NetJ4_2: J4.2 U1.10 | length 2019.9
  Top Layer w6: U1.10@2459.65,1010.93 2364.44,1010.93 2362.51,1009 2164.49,1009 2065.5,1107.99 2065.5,1380.25 2374,1688.75 2374,2019 2549,2194 2754,2194 2770,2210 J4.2@2770,2280
NetJ4_3: J4.3 U1.9 | length 2248
  Top Layer w6: U1.9@2459.65,1041.93 2452.65,1034.93 2365.81,1034.93 2355.88,1025 2171.12,1025 2081.5,1114.62 2081.5,1169.38 2124.36,1212.24 2392.24,1212.24 2430,1250 2430,1525 2390,1565 2390,2000 2568,2178 2760.63,2178 2786,2203.37 2786,2238.7 2787.75,2240.45 2788.46,2241.17 ccw(c2770,2280) 2812.68,2274.78 cw(c2818.63,2274) 2812.74,2275.15 2813,2276.49 2813.81,2277.57 cw(c2818.63,2274) 2814.88,2278.68 2816.52,2280 J4.3@2870,2280
NetJ4_4: J4.4 U1.2 | length 1608.4
  Top Layer w6: 2704,1095.35 2711,1102.35 2711,1125.38 2712,1126.38 2712,1131.25 2719.62,1138.87 2750.38,1138.87 2774.25,1115 2865,1115 2915,1165 2915,1540 3205,1830 3205,2045 J4.4@2970,2280
NetJ4_5: J4.5 U1.1 | length 1542.3
  Top Layer w6: 2735,1095.35 2875.35,1095.35 2935,1155 2935,1520 3235,1820 3235,2115 J4.5@3070,2280
NetJ4_6: J4.6 U1.32 | length 1510.1
  Top Layer w6: U1.32@2790.35,1041.93 2851.93,1041.93 2959.91,1149.91 2959.91,1504.91 3265,1810 3265,2185 J4.6@3170,2280
NetJ9_8: J9.8 U1.14 | length 1894.4
  Top Layer w6: J9.8@2310,2280 2310,1735 1993,1418 1993,1089.98 2223.98,859 2375.77,859 2394.7,877.93 2452.65,877.93 U1.14@2459.65,884.93
NetJ9_9: J9.9 U1.13 | length 1908.9
  Top Layer w6: J9.9@2410,2280 2410,2202.63 2326,2118.63 2326,1716 2009,1399 2009,1096.61 2230.61,875 2369.14,875 2403.07,908.93 2452.65,908.93 U1.13@2459.65,915.93
NetJ9_10: J9.10 U1.12 | length 1923.8
  Top Layer w6: U1.12@2459.65,947.93 2452.65,940.93 2412.44,940.93 2362.51,891 2237.23,891 2025,1103.23 2025,1385 2342,1702 2342,2082 2500.92,2240.92 2500.92,2270.92 J9.10@2510,2280
NetLED1_2: LED1.2 R4.2 | length 132
  Top Layer w6: 873,430 1005,430
NetLED2_2: LED2.2 R3.2 | length 215
  Top Layer w6: LED2.2@670,730 R3.2@885,730
NetLED3_2: LED3.2 R7.2 | length 266.8
  Top Layer w6: R7.2@570,1787 570,1665 625,1610 LED3.2@625,1543
NetLED4_2: LED4.2 R8.2 | length 389.9
  Top Layer w6: R8.2@685,1787 685,1628.51 688.51,1625 826.49,1625 830,1621.49 LED4.2@830,1538
NetLED5_1: LED5.1 R9.2 | length 195
  Top Layer w6: LED5.1@1295,833 R9.2@1490,833
RESET: C1.1 C13.1 J2.3 J10.3 R1.1 SW1.1 SW1.2 U1.29 | length 8158.8
  Top Layer w6: 813,2360 818,2365 v1(905,2365) ; v1(1025,2055) 985.9,2015.9 983.42,2015.9 980.93,2015.9 979.17,2017.66 977.97,2018.86 ccw(c951.76,2013.49) 975,2026.74 975,2039.31 ccw(c950,2039.31) 925,2039.31 925,1976.69 925,1963.97 981,1907.97 981,1521.49 1080,1422.49 1080,1028.08 1060,1008.08 v1(1060,1000) ; v1(1180,680) 1180,690 1212.06,722.06 ; v1(1240,460) 1235,455 1235,405 1258,382 1345,382 1345.16,381.84 SW1.1@1345.16,263.11 ; R1.1@1600,382 R1.1@1602.99,379.01 ; SW1.2@1605,263.11 1605,377 R1.1@1602.99,379.01 ; J10.3@2171,380 2171,541.49 2167.49,545 1710,545 1695,530 1648.5,483.5 ; v1(2430,720) 1860,720 1857.24,720 1775.24,638 1296.12,638 1212.06,722.06 ; v1(2540,855) 2530,855 2515,870 2515,920 2542.93,947.93 U1.29@2790.35,947.93 ; 1212.06,722.06 1021.12,913 562.38,913 561.88,912.5 488.12,912.5 487.62,913 388.51,913 385,909.49 385,830 395.25,819.75 622.37,819.75 661.71,780.4 910.48,780.4 959.24,731.64 959.24,624.95 1079.19,505 1274.12,505 1304.12,535 1385.88,535 1415.88,505 1529.12,505 1559.12,535 1640.88,535 1648.5,527.38 1648.5,483.5 ; R1.1@1602.99,379.01 1644.5,379.01 1648.5,383.01 1648.5,483.5
  Bottom Layer w6: v1(905,2365) 960,2365 1045,2280 1045,2083.08 1025,2063.08 v1(1025,2055) ; v1(1060,1000) 1068.42,991.58 1090.86,991.58 1097.76,984.68 1097.76,967.24 1112.1,952.9 1126.31,952.9 1150,929.21 1150,912.33 1138.21,900.54 1138.21,891.79 v1@1140,890 ; v1(1120,890) v1@1140,890 ; v1(1240,460) 1240,540 v1(1215,565) 1180,600 v1(1180,680) 1180,850 1164.21,865.79 1144.21,865.79 1134.37,875.63 1134.37,884.37 v1@1140,890 ; v1(2430,720) 2531.58,821.58 2531.58,846.58 v1(2540,855)
USB_+5V: 1.3 C2.2 C11.2 J1.1 TP1.1 U2.16 | length 1056.7
  Top Layer w6: C11.2@485,2243 486,2242 600,2242
  Top Layer w20: 1.3@135,1790 135,1964.49 173.51,2003 173.51,2173.51 235,2235 271.09,2235 298.88,2207.2 306.25,2207.2 364.5,2265.45 429.5,2265.45 429.5,2344.5 430,2345 TP1.1@430,2490
USB_D+: D1.1 J1.3 TP7.1 U2.5 | length 1636
  Top Layer w20: 306.25,2144.22 380,2144.22 441.22,2083 603.4,2083 610.4,2090 767.19,2090 798,2059.19 798,2044.23 cw(c779.23,2037.31) 799.23,2037.31 799.23,2008.77 800,2008 ; 800,2059.19 800,2075 864.37,2139.37 923.93,2139.37 982,2197.44 982,2413 ; TP7.1@900,2495 982,2413 ; v1(1135,2390) 1005,2390 982,2413 ; v1(1270,2285) 1270,2224.39 1307.3,2187.09 1307.3,2181.18 1311.08,2177.4 1316.99,2177.4
  Bottom Layer w20: v1(1135,2390) 1234.26,2290.74 1264.26,2290.74 v1(1270,2285)
USB_D-: D1.3 J1.2 TP8.1 U2.6 | length 2087.5
  Top Layer w20: 258.86,2175.72 203.51,2120.36 203.51,1980.48 338.99,1845 848.78,1845 860.5,1856.72 860.5,1965.11 850,1975.61 850,2008 850,2039.31 904.07,2093.37 963.37,2093.37 979.37,2109.37 1127.5,2257.5 ; 1316.99,2102.6 1313.37,2106.22 1278.78,2106.22 1127.5,2257.5 ; TP8.1@1370,2500 1127.5,2257.5
pads on no net: D1.4 D1.6 J1.4 J10.1 J10.8 U1.19 U1.22 U2.9 U2.10 U2.11 U2.12 U2.14 U2.15

## Polygon pours and split planes (outlines as drawn)
no net on Drill Guide "NONET_L-01_P-001" (solid): 0,2685 3500,2685 3500,-315 0,-315
GND on Bottom Layer "GND_L02_P002" (solid, pour order 2): 0,2685 3500,2685 3500,0 0,0

## Keep-outs
Keep-Out Layer:
  the board outline again, w20

## Silkscreen, mask and mechanical layers (free items; w line width, h text height)
Top Overlay:
  drawing of 17 lines, arcs and shapes, not listed
  text "USB D+" at 675,2615 h40
  text "USB D-" at 1170,2615 h40
  text "USB +5V" at 165,2610 h40
  text "GND" at 3110,2510 h50 r180
  text "GND" at 2110,2500 h50 r180
  text "CH340" at 560,2050 h40 r90
  text "RxD" at 3395,2025 h40 r90
  text "TxD" at 3300,2020 h40 r90
  text "TVS" at 1300,2015 h40
  text "12MHz" at 980,1795 h40
  text "USB_5V" at 65,1755 h30 r90
  text "Vaishnavi" at 3130,1615 h60 r90
  text "Rx" at 805,1605 h40
  text "Tx" at 585,1600 h40
  text "ADP_5V" at 60,1520 h30 r90
  text "Tx" at 2955,1495 h40
  text "16MHz" at 2270,1390 h40
  text "Rx" at 2945,1235 h40
  text "ECEN5730" at 1750,1115 h40 r90
  text "03.09.2023" at 1835,1115 h40 r90
  text "SCL" at 3060,1045 h40
  text "Golden Arduino" at 1605,985 h84 r90
  text "3.3V" at 60,965 h30 r90
  text "ICSP" at 1670,905 h40
  text "3.3V" at 595,895 h40
  text "SCK" at 1245,875 h40
  text "ANALOG IN" at 2985,545 h40
  text "POWER ON" at 750,495 h50
  text "+5V" at 2095,455 h40 r90
  text "RESET" at 2195,455 h40 r90
  text "GND" at 2500,455 h40 r90
  text "GND" at 2605,455 h40 r90
  text "3.3V" at 2310,450 h40 r90
  text "A1" at 2990,450 h40 r90
  text "A2" at 3090,450 h40 r90
  text "+5V" at 2405,445 h40 r90
  text "A0" at 2890,445 h40 r90
  text "A3" at 3185,445 h40 r90
  text "A4" at 3285,445 h40 r90
  text "A5" at 3385,445 h40 r90
  text "GND" at 3065,155.02 h50
  text "GND" at 2210,150 h60
  text "RESET" at 1345,30 h60
  text "TP_5V" at 885,13.33 h50

## Text inside footprints (layer, text, board x,y; h text height)
J4: Top Overlay "D7" at 2676,2151.81 h30 r45; Top Overlay "D4" at 2982,2150 h30 r45; Top Overlay "D3~" at 3066,2130 h30 r45; Top Overlay "D2" at 3179,2152 h30 r45; Top Overlay "D1" at 3286,2160 h30 r45; Top Overlay "D0" at 3376,2151.81 h30 r45; Top Overlay "D5~" at 2876,2127.07 h30 r45; Top Overlay "D6~" at 2766,2127.07 h30 r45
J9: Top Overlay "D8" at 2524,2149.41 h30 r45; Top Overlay "D9~" at 2401,2124.67 h30 r45; Top Overlay "D10~" at 2292,2107 h30 r45; Top Overlay "D11~" at 2191,2110.53 h30 r45; Top Overlay "D12" at 2098,2131.74 h30 r45; Top Overlay "D13" at 2007,2131.74 h30 r45; Top Overlay "GND" at 1901,2128.21 h30 r45; Top Overlay "AREF" at 1774,2107 h30 r45; Top Overlay "SDA" at 1698,2128.21 h30 r45; Top Overlay "SCL" at 1606,2128.21 h30 r45